# EAGLE board EscapeRoom_Shield_Mega_Master (EAGLE 9.6.2)
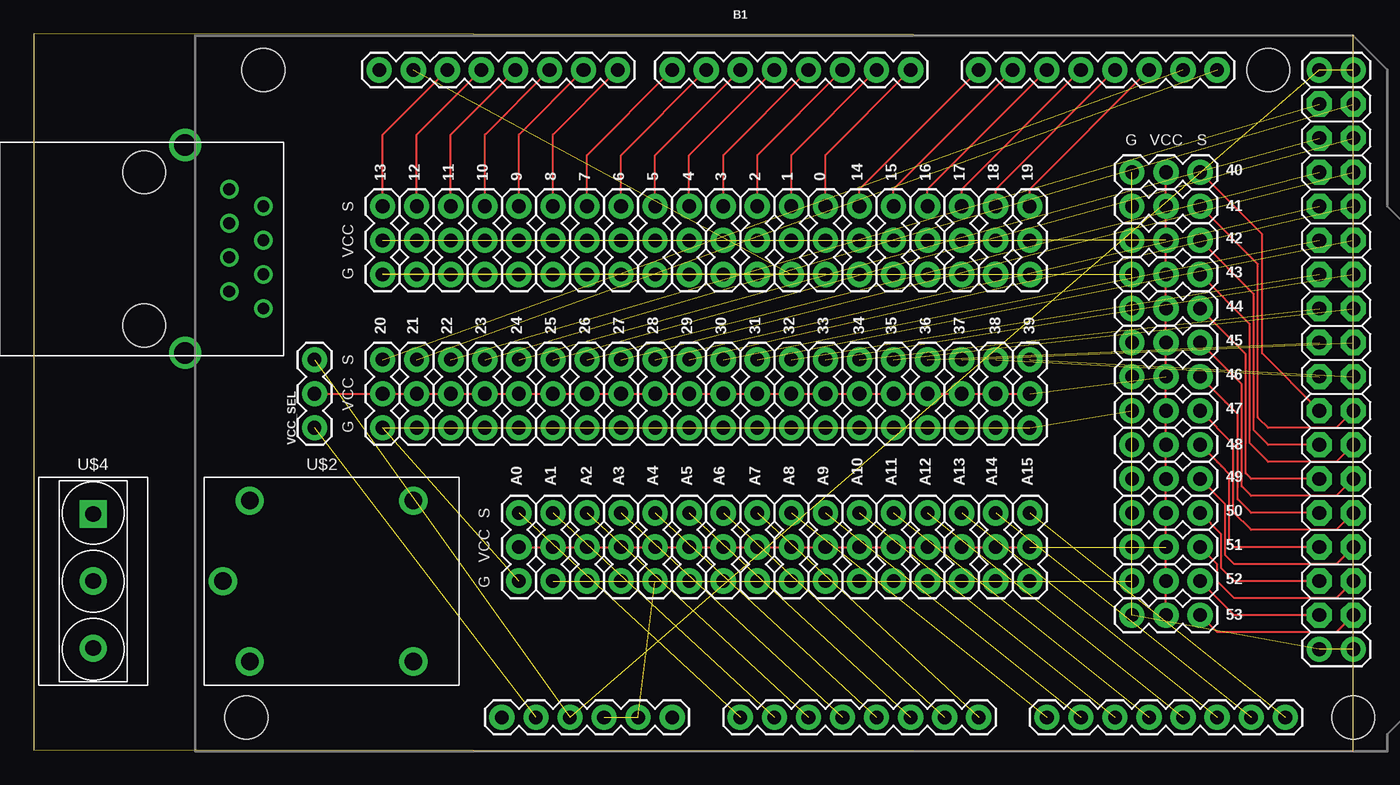
[diagram p0: board, top side]

Size 98.41 x 53.52 mm. Coordinates in mm from the lower left corner, seen from the top.
Outline: 0,0.13 98.41,0 98.41,53.39 0,53.52 0,0.13
Copper layers (1*16): Top 0.035mm / dielectric 1.5mm / Bottom 0.035mm
Design rules "default": minimum track width 6mil, minimum drill 0.35mm, track to track 6mil, track to pad 6mil, pad to pad 6mil, via to via 6mil, smd to smd 6mil, copper to edge 40mil, drill to drill 6mil, minimum pad ring 10mil, minimum via ring 8mil, stop-mask expansion 4mil, vias tented up to drill 0mil, thermal gap 10mil

## Footprints (pad centres in the part's own frame; a part is rotated, then mirrored left to right if it is on the bottom)
1X03 = drill 1.016 pad 1.88: 1 0,0; 2 2.54,0; 3 5.08,0
ARDUINO_MEGA = drill 1.016 pad 1.88: 0 13.97,24.13; 1 11.43,24.13; 2 8.89,24.13; 3 6.35,24.13; 3.3V -13.97,-24.13; 4 3.81,24.13; 5 1.27,24.13; 5V@0 -11.43,-24.13; 5V@1 44.45,24.13; 5V@2 46.99,24.13; 6 -1.27,24.13; 7 -3.81,24.13; 8 -7.874,24.13; 9 -10.414,24.13; 10 -12.954,24.13; 11 -15.494,24.13; 12 -18.034,24.13; 13 -20.574,24.13; 14 19.05,24.13; 15 21.59,24.13; 16 24.13,24.13; 17 26.67,24.13; 18 29.21,24.13; 19 31.75,24.13; 20 34.29,24.13; 21 36.83,24.13; A0 1.27,-24.13; A1 3.81,-24.13; A2 6.35,-24.13; A3 8.89,-24.13; A4 11.43,-24.13; A5 13.97,-24.13; A6 16.51,-24.13; A7 19.05,-24.13; A8 24.13,-24.13; A9 26.67,-24.13; A10 29.21,-24.13; A11 31.75,-24.13; A12 34.29,-24.13; A13 36.83,-24.13; A14 39.37,-24.13; A15 41.91,-24.13; AREF -25.654,24.13; GND@0 -8.89,-24.13; GND@1 -6.35,-24.13; GND@2 44.45,-19.05; GND@3 46.99,-19.05; GND@4 -23.114,24.13; RESET -16.51,-24.13; VIN -3.81,-24.13 | drill 1.016 pad 1.88 octagon: 22 44.45,21.59; 23 46.99,21.59; 24 44.45,19.05; 25 46.99,19.05; 26 44.45,16.51; 27 46.99,16.51; 28 44.45,13.97; 29 46.99,13.97; 30 44.45,11.43; 31 46.99,11.43; 32 44.45,8.89; 33 46.99,8.89; 34 44.45,6.35; 35 46.99,6.35; 36 44.45,3.81; 37 46.99,3.81; 38 44.45,1.27; 39 46.99,1.27; 40 44.45,-1.27; 41 46.99,-1.27; 42 44.45,-3.81; 43 46.99,-3.81; 44 44.45,-6.35; 45 46.99,-6.35; 46 44.45,-8.89; 47 46.99,-8.89; 48 44.45,-11.43; 49 46.99,-11.43; 50 44.45,-13.97; 51 46.99,-13.97; 52 44.45,-16.51; 53 46.99,-16.51 | hole 3.2: -34.29,24.13; -35.56,-24.13; 40.64,24.13; 46.99,-24.13
RJ45_MTJ-88GX1-FSD-PG6 = drill 0.889: P$1 1.27,6.35; P$2 2.54,8.89; P$3 3.81,6.35; P$4 5.08,8.89; P$5 6.35,6.35; P$6 7.62,8.89; P$7 8.89,6.35; P$8 10.16,8.89 | drill 1.6: P$9 -2.032,3.048; P$10 13.462,3.048 | hole 3.2: 0,0; 11.43,0
RELAY-19.0X15.0X15.0MM = drill 1.3 pad 2.1: 1 -8.1,0; 2 -6.1,-6; 3 -6.1,6; 4 6.1,-6; 5 6.1,6
DFMINI = drill 1.016 pad 1.88: P$1 0,2.54; P$2 0,0; P$3 0,5.08; P$4 0,7.62; P$5 0,10.16; P$6 0,12.7; P$7 0,15.24; P$8 0,17.78; P$9 17.78,0; P$10 17.78,2.54; P$11 17.78,5.08; P$12 17.78,7.62; P$13 17.78,10.16; P$14 17.78,12.7; P$15 17.78,15.24; P$16 17.78,17.78
H3-5.0-15.5X8.0MM = drill 1.168 pad 2.032 square: 1 0,5 | drill 1.168 pad 2.032: 2 0,0; 3 0,-5

## Placement (x,y rotation side)
0  1X03  [1X03]  59.05,35.56 90 top
1  1X03  [1X03]  56.52,35.56 90 top
2  1X03  [1X03]  53.98,35.56 90 top
3  1X03  [1X03]  51.43,35.56 90 top
4  1X03  [1X03]  48.89,35.56 90 top
5  1X03  [1X03]  46.35,35.56 90 top
6  1X03  [1X03]  43.81,35.56 90 top
7  1X03  [1X03]  41.27,35.56 90 top
8  1X03  [1X03]  38.73,35.56 90 top
9  1X03  [1X03]  36.2,35.56 90 top
10  1X03  [1X03]  33.66,35.56 90 top
11  1X03  [1X03]  31.12,35.56 90 top
12  1X03  [1X03]  28.58,35.56 90 top
13  1X03  [1X03]  26.04,35.56 90 top
14  1X03  [1X03]  61.59,35.56 90 top
15  1X03  [1X03]  64.14,35.56 90 top
16  1X03  [1X03]  66.67,35.56 90 top
17  1X03  [1X03]  69.22,35.56 90 top
18  1X03  [1X03]  71.75,35.56 90 top
19  1X03  [1X03]  74.3,35.56 90 top
20  1X03  [1X03]  26.04,24.13 90 top
21  1X03  [1X03]  28.58,24.13 90 top
22  1X03  [1X03]  31.12,24.13 90 top
23  1X03  [1X03]  33.66,24.13 90 top
24  1X03  [1X03]  36.2,24.13 90 top
25  1X03  [1X03]  38.73,24.13 90 top
26  1X03  [1X03]  41.27,24.13 90 top
27  1X03  [1X03]  43.81,24.13 90 top
28  1X03  [1X03]  46.35,24.13 90 top
29  1X03  [1X03]  48.89,24.13 90 top
30  1X03  [1X03]  51.43,24.13 90 top
31  1X03  [1X03]  53.98,24.13 90 top
32  1X03  [1X03]  56.52,24.13 90 top
33  1X03  [1X03]  59.05,24.13 90 top
34  1X03  [1X03]  61.59,24.13 90 top
35  1X03  [1X03]  64.14,24.13 90 top
36  1X03  [1X03]  66.67,24.13 90 top
37  1X03  [1X03]  69.22,24.13 90 top
38  1X03  [1X03]  71.75,24.13 90 top
39  1X03  [1X03]  74.3,24.13 90 top
40  1X03  [1X03]  81.92,43.18 0 top
41  1X03  [1X03]  81.92,40.64 0 top
42  1X03  [1X03]  81.92,38.1 0 top
43  1X03  [1X03]  81.92,35.56 0 top
44  1X03  [1X03]  81.92,33.02 0 top
45  1X03  [1X03]  81.92,30.48 0 top
46  1X03  [1X03]  81.92,27.94 0 top
47  1X03  [1X03]  81.92,25.4 0 top
48  1X03  [1X03]  81.92,22.86 0 top
49  1X03  [1X03]  81.92,20.32 0 top
50  1X03  [1X03]  81.92,17.78 0 top
51  1X03  [1X03]  81.92,15.24 0 top
52  1X03  [1X03]  81.92,12.7 0 top
53  1X03  [1X03]  81.92,10.16 0 top
A0  1X03  [1X03]  36.2,12.7 90 top
A1  1X03  [1X03]  38.73,12.7 90 top
A2  1X03  [1X03]  41.27,12.7 90 top
A3  1X03  [1X03]  43.81,12.7 90 top
A4  1X03  [1X03]  46.35,12.7 90 top
A5  1X03  [1X03]  48.89,12.7 90 top
A6  1X03  [1X03]  51.43,12.7 90 top
A7  1X03  [1X03]  53.98,12.7 90 top
A8  1X03  [1X03]  56.52,12.7 90 top
A9  1X03  [1X03]  59.05,12.7 90 top
A10  1X03  [1X03]  61.59,12.7 90 top
A11  1X03  [1X03]  64.14,12.7 90 top
A12  1X03  [1X03]  66.67,12.7 90 top
A13  1X03  [1X03]  69.22,12.7 90 top
A14  1X03  [1X03]  71.75,12.7 90 top
A15  1X03  [1X03]  74.3,12.7 90 top
B1  ARDUINO_MEGA_R3FULL  [ARDUINO_MEGA]  51.43,26.67 0 top
U$1  ETHERNET_MTJ-88GX1-FSD-PG6  [RJ45_MTJ-88GX1-FSD-PG6]  8.26,43.18 270 top
U$2  RELAY-AZ943-1CH-5DE  [RELAY-19.0X15.0X15.0MM]  22.23,12.7 0 top
U$3  DFPLAYER_MINI  [DFMINI]  -17.15,48.26 90 top  (outside the outline)
U$4  TERMINAL_BLOCK_3P  [H3-5.0-15.5X8.0MM]  4.45,12.7 0 top
VCC_SEL  1X03  [1X03]  20.95,24.13 90 top

## Library data of the parts
0 1-53 A0 A1-A15 B1 U$1-U$4 VCC_SEL = Adam's Parts (work)

## Nets
0: 0.3 B1.0
1: 1.3 B1.1
2: 2.3 B1.2
3: 3.3 B1.3
3.3V: B1.3.3V VCC_SEL.1
4: 4.3 B1.4
5: 5.3 B1.5
5V: B1.5V@0 B1.5V@1 B1.5V@2 VCC_SEL.3
6: 6.3 B1.6
7: 7.3 B1.7
8: 8.3 B1.8
9: 9.3 B1.9
10: 10.3 B1.10
11: 11.3 B1.11
12: 12.3 B1.12
12V: B1.VIN
13: 13.3 B1.13
14: 14.3 B1.14
15: 15.3 B1.15
16: 16.3 B1.16
17: 17.3 B1.17
18: 18.3 B1.18
19: 19.3 B1.19
20: 20.3 B1.20
21: 21.3 B1.21
22: 22.3 B1.22
23: 23.3 B1.23
24: 24.3 B1.24
25: 25.3 B1.25
26: 26.3 B1.26
27: 27.3 B1.27
28: 28.3 B1.28
29: 29.3 B1.29
30: 30.3 B1.30
31: 31.3 B1.31
32: 32.3 B1.32
33: 33.3 B1.33
34: 34.3 B1.34
35: 35.3 B1.35
36: 36.3 B1.36
37: 37.3 B1.37
38: 38.3 B1.38
39: 39.3 B1.39
40: 40.3 B1.40
41: 41.3 B1.41
42: 42.3 B1.42
43: 43.3 B1.43
44: 44.3 B1.44
45: 45.3 B1.45
46: 46.3 B1.46
47: 47.3 B1.47
48: 48.3 B1.48
49: 49.3 B1.49
50: 50.3 B1.50
51: 51.3 B1.51
52: 52.3 B1.52
53: 53.3 B1.53
A0: A0.3 B1.A0
A1: A1.3 B1.A1
A2: A2.3 B1.A2
A3: A3.3 B1.A3
A4: A4.3 B1.A4
A5: A5.3 B1.A5
A6: A6.3 B1.A6
A7: A7.3 B1.A7
A8: A8.3 B1.A8
A9: A9.3 B1.A9
A10: A10.3 B1.A10
A11: A11.3 B1.A11
A12: A12.3 B1.A12
A13: A13.3 B1.A13
A14: A14.3 B1.A14
A15: A15.3 B1.A15
GND: 0.1 1.1 2.1 3.1 4.1 5.1 6.1 7.1 8.1 9.1 10.1 11.1 12.1 13.1 14.1 15.1 16.1 17.1 18.1 19.1 20.1 21.1 22.1 23.1 24.1 25.1 26.1 27.1 28.1 29.1 30.1 31.1 32.1 33.1 34.1 35.1 36.1 37.1 38.1 39.1 40.1 41.1 42.1 43.1 44.1 45.1 46.1 47.1 48.1 49.1 50.1 51.1 52.1 53.1 A0.1 A1.1 A2.1 A3.1 A4.1 A5.1 A6.1 A7.1 A8.1 A9.1 A10.1 A11.1 A12.1 A13.1 A14.1 A15.1 B1.GND@0 B1.GND@1 B1.GND@2 B1.GND@3 B1.GND@4
VCC: 0.2 1.2 2.2 3.2 4.2 5.2 6.2 7.2 8.2 9.2 10.2 11.2 12.2 13.2 14.2 15.2 16.2 17.2 18.2 19.2 20.2 21.2 22.2 23.2 24.2 25.2 26.2 27.2 28.2 29.2 30.2 31.2 32.2 33.2 34.2 35.2 36.2 37.2 38.2 39.2 40.2 41.2 42.2 43.2 44.2 45.2 46.2 47.2 48.2 49.2 50.2 51.2 52.2 53.2 A0.2 A1.2 A2.2 A3.2 A4.2 A5.2 A6.2 A7.2 A8.2 A9.2 A10.2 A11.2 A12.2 A13.2 A14.2 A15.2 VCC_SEL.2

## Tracks (layer width: path | path; a pad name or v marks a point on that pad's centre or on a via)
0
  Top 0.152: 0.3 59.05,44.45 B1.0
1
  Top 0.152: 1.3 56.52,44.45 B1.1
2
  Top 0.152: 2.3 53.98,44.45 B1.2
3
  Top 0.152: 3.3 51.43,44.45 B1.3
3.3V  (1 unrouted)
4
  Top 0.152: 4.3 48.89,44.45 B1.4
5
  Top 0.152: 5.3 46.35,44.45 B1.5
5V  (3 unrouted)
6
  Top 0.152: 6.3 43.81,44.45 B1.6
7
  Top 0.152: 7.3 41.27,44.45 B1.7
8
  Top 0.152: 8.3 38.73,45.97 B1.8
9
  Top 0.152: 9.3 36.2,45.97 B1.9
10
  Top 0.152: 10.3 33.66,45.97 B1.10
11
  Top 0.152: 11.3 31.12,45.97 B1.11
12
  Top 0.152: 12.3 28.58,45.97 B1.12
13
  Top 0.152: 13.3 26.04,45.97 B1.13
14
  Top 0.152: 14.3 61.59,41.91 B1.14
15
  Top 0.152: 15.3 64.14,41.91 B1.15
16
  Top 0.152: 16.3 66.67,41.91 B1.16
17
  Top 0.152: 17.3 69.22,41.91 B1.17
18
  Top 0.152: 18.3 71.75,41.91 B1.18
19
  Top 0.152: 19.3 74.3,41.91 B1.19
20  (1 unrouted)
21  (1 unrouted)
22  (1 unrouted)
23  (1 unrouted)
24  (1 unrouted)
25  (1 unrouted)
26  (1 unrouted)
27  (1 unrouted)
28  (1 unrouted)
29  (1 unrouted)
30  (1 unrouted)
31  (1 unrouted)
32  (1 unrouted)
33  (1 unrouted)
34  (1 unrouted)
35  (1 unrouted)
36  (1 unrouted)
37  (1 unrouted)
38  (1 unrouted)
39  (1 unrouted)
40
  Top 0.152: B1.40 91.62,29.67 91.62,38.56 40.3
41
  Top 0.152: B1.41 97.16,24.13 92.08,24.13 91.31,24.89 91.31,36.32 41.3
42
  Top 0.152: B1.42 92.08,22.86 91.01,23.93 91.01,34.09 42.3
43
  Top 0.152: B1.43 97.16,21.59 92.08,21.59 90.7,22.96 90.7,31.85 43.3
44
  Top 0.152: B1.44 90.81,20.32 90.4,20.73 90.4,29.62 44.3
45
  Top 0.152: B1.45 97.16,19.05 90.81,19.05 90.09,19.76 90.09,27.38 45.3
46
  Top 0.152: 46.3 88.27,26.67 88.88,26.06 89.79,25.15 89.79,18.8 90.81,17.78 B1.46
47
  Top 0.152: B1.47 97.16,16.51 90.81,16.51 89.48,17.83 89.48,22.91 47.3
48
  Top 0.152: 48.3 88.27,21.59 88.57,21.29 89.18,20.68 89.18,15.6 89.54,15.24 B1.48
49
  Top 0.152: B1.49 97.16,13.97 89.54,13.97 88.88,14.63 88.88,18.44 49.3
50
  Top 0.152: B1.50 89.54,12.7 88.57,13.66 88.57,16.2 50.3
51
  Top 0.152: B1.51 97.16,11.43 89.54,11.43 88.27,12.7 88.27,13.97 51.3
52
  Top 0.152: B1.52 89.54,10.16 52.3
53
  Top 0.152: B1.53 97.16,8.89 88.27,8.89 53.3
A0  (1 unrouted)
A1  (1 unrouted)
A2  (1 unrouted)
A3  (1 unrouted)
A4  (1 unrouted)
A5  (1 unrouted)
A6  (1 unrouted)
A7  (1 unrouted)
A8  (1 unrouted)
A9  (1 unrouted)
A10  (1 unrouted)
A11  (1 unrouted)
A12  (1 unrouted)
A13  (1 unrouted)
A14  (1 unrouted)
A15  (1 unrouted)
GND  (74 unrouted)
VCC  (22 unrouted)
  Top 0.152: 39.2 38.2 37.2 36.2 35.2 34.2 33.2 32.2 31.2 30.2 29.2 28.2 27.2 26.2 25.2 24.2 23.2 22.2 21.2 20.2 VCC_SEL.2 | 53.2 52.2 51.2 50.2 49.2 48.2 47.2 46.2 45.2 44.2 43.2 42.2 41.2 40.2 | A15.2 A14.2 A13.2 A12.2 A11.2 A10.2 A9.2 A8.2 A7.2 A6.2 A5.2 A4.2 A3.2 A2.2 A1.2 A0.2

## Text on the board
tNames: G | VCC | S | S | VCC | G | S | VCC | G | S | VCC | G